# EAGLE board panel (EAGLE 7.5.0)
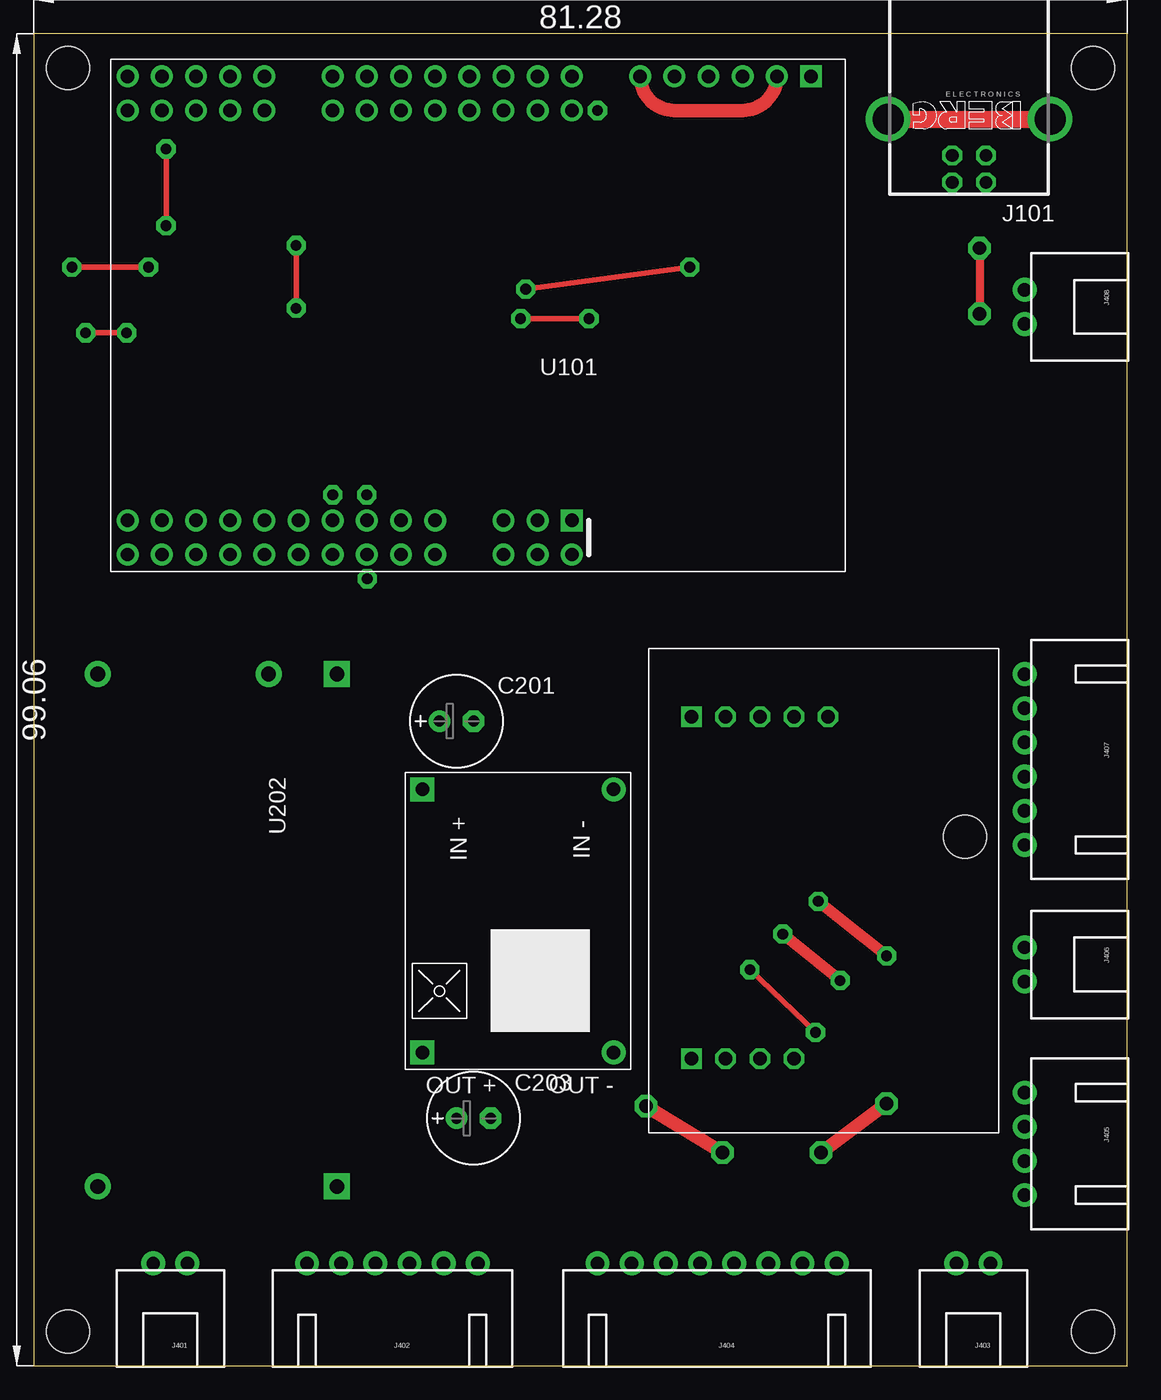
[diagram p0: board, top side]
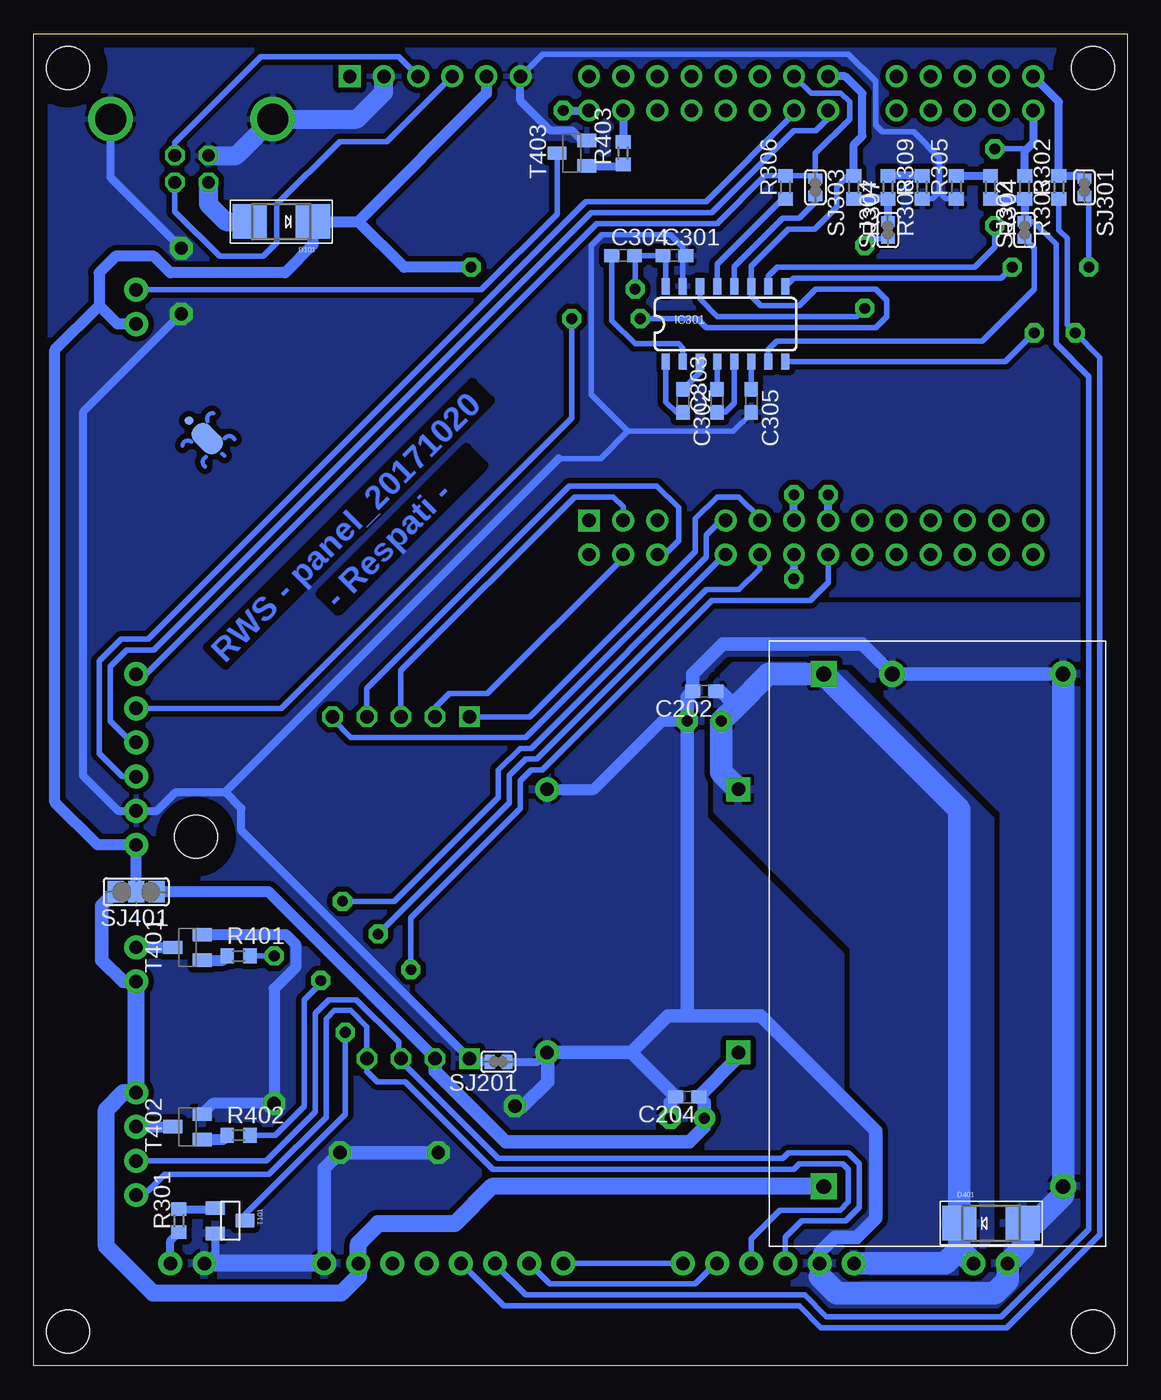
[diagram p1: board, bottom side, seen from below]

Size 81.28 x 99.06 mm. Coordinates in mm from the lower left corner, seen from the top.
Outline: 0,0 81.28,0 81.28,99.06 0,99.06 0,0
Copper layers (1*16): Top 0.035mm / dielectric 1.5mm / Bottom 0.035mm
Design rules "default *": minimum track width 10mil, minimum drill 24mil, track to track 8mil, track to pad 8mil, pad to pad 8mil, via to via 8mil, smd to smd 8mil, copper to edge 40mil, drill to drill 8mil, minimum pad ring 10mil, minimum via ring 8mil, stop-mask expansion 4mil, vias tented up to drill 0mil, thermal gap 10mil
Net classes: 0 default: width 0.406 mm, drill 0.59 mm, clearance 0.254 mm; 2 power: width 0.61 mm, drill 0.8 mm, clearance 0.305 mm
Holes 3.2 mm at 2.54,2.54 78.74,2.54 78.74,96.52 2.54,96.52
bRestrict: area 0,0 to 5.1,5.1; area 76.2,0 to 81.3,5.1; area 76.2,94 to 81.3,99.1; area 0,94 to 5.1,99.1

## Footprints (pad centres in the part's own frame; a part is rotated, then mirrored left to right if it is on the bottom)
E2,5-7 = drill 0.813 pad 1.6: + -1.27,0 | drill 0.813 pad 1.6 octagon: - 1.27,0
C0603 = smd 1.1 x 1: 1 -0.85,0; 2 0.85,0
SMADIODE = smd 2.54 x 2.54: A 2.349,0; C -2.349,0
SO016 = smd 0.6 x 1.2: 1 -4.445,-2.8; 2 -3.175,-2.8; 3 -1.905,-2.8; 4 -0.635,-2.8; 5 0.635,-2.8; 6 1.905,-2.8; 7 3.175,-2.8; 8 4.445,-2.8; 9 4.445,2.8; 10 3.175,2.8; 11 1.905,2.8; 12 0.635,2.8; 13 -0.635,2.8; 14 -1.905,2.8; 15 -3.175,2.8; 16 -4.445,2.8
PN61729-S = drill 0.95 octagon: 1 1.25,4.71; 2 -1.25,4.71; 3 -1.25,2.71; 4 1.25,2.71 | drill 2.3 pad 2.9: S1 -6.02,0; S2 6.02,0
XH-2-RA = drill 1 pad 1.778: 1 -1.27,0; 2 1.27,0
XH-6-RA = drill 1 pad 1.778: 1 -6.35,0; 2 -3.81,0; 3 -1.27,0; 4 1.27,0; 5 3.81,0; 6 6.35,0
XH-8-RA = drill 1 pad 1.778: 1 -8.89,0; 2 -6.35,0; 3 -3.81,0; 4 -1.27,0; 5 1.27,0; 6 3.81,0; 7 6.35,0; 8 8.89,0
XH-4-RA = drill 1 pad 1.778: 1 -3.81,0; 2 -1.27,0; 3 1.27,0; 4 3.81,0
R0603 = smd 1 x 1.1: 1 -0.85,0; 2 0.85,0
SJS = smd 0.762 x 1.016: 1 -0.635,0; 2 0.635,0
SJ_2 = smd 1.168 x 1.6: 1 -1.524,0; 2 0,0; 3 1.524,0
SOT23 = smd 1 x 1.4: 1 -0.95,-1.1; 2 0.95,-1.1; 3 0,1.1
SOT23-BEC = smd 1 x 1.4: B -0.95,-1.1; C 0,1.1; E 0.95,-1.1
MODULE_MEGA = drill 1 pad 1.626 square: P1 2.54,1.27; S1 20.32,34.29 | drill 1 pad 1.626: P2 5.08,1.27; P3 7.62,1.27; P4 10.16,1.27; P5 12.7,1.27; P6 15.24,1.27; S2 20.32,36.83; S3 22.86,34.29; S4 22.86,36.83; S5 25.4,34.29; S6 25.4,36.83; X1 30.48,34.29; X2 30.48,36.83; X3 33.02,34.29; X4 33.02,36.83; X5 35.56,36.83; X6 35.56,34.29; X7 38.1,34.29; X8 38.1,36.83; X9 40.64,34.29; X10 40.64,36.83; X11 43.18,34.29; X12 43.18,36.83; X13 45.72,34.29; X14 45.72,36.83; X15 48.26,34.29; X16 48.26,36.83; X17 50.8,34.29; X18 50.8,36.83; X19 53.34,34.29; X20 53.34,36.83; Y1 20.32,1.27; Y2 20.32,3.81; Y3 22.86,1.27; Y4 22.86,3.81; Y5 25.4,1.27; Y6 25.4,3.81; Y7 27.94,1.27; Y8 27.94,3.81; Y9 30.48,1.27; Y10 30.48,3.81; Y11 33.02,1.27; Y12 33.02,3.81; Y13 38.1,3.81; Y14 35.56,3.81; Y15 38.1,1.27; Y16 35.56,1.27; Z1 43.18,1.27; Z2 43.18,3.81; Z3 45.72,1.27; Z4 45.72,3.81; Z5 48.26,1.27; Z6 48.26,3.81; Z7 50.8,1.27; Z8 50.8,3.81; Z9 53.34,1.27; Z10 53.34,3.81
MP1584_MIN = drill 1 pad 1.778 square: 1 1.27,1.27; 3 20.83,1.27 | drill 1 pad 1.778: 2 1.27,15.49; 4 20.83,15.49
MOD_LM2596 = drill 1.1 pad 1.93 square: 1 -42.545,20.955; 2 -4.445,20.955 | drill 1.1 pad 1.93: 3 -42.545,3.175; 4 -4.445,3.175; 5 -42.545,15.875
MCP2515_CAN = drill 1 pad 1.524 square: 1 30.48,3.175; 5 5.08,3.175 | drill 1 pad 1.524 octagon: 2 30.48,5.715; 3 30.48,8.255; 4 30.48,10.795; 6 5.08,5.715; 7 5.08,8.255; 8 5.08,10.795; 9 5.08,13.335 | hole 3.2: 14,23.5
KURRO-LOGO = smd 2.54 x 1.651 rotated 45 bottom: P$1 0,0 | smd 0.635 x 0.635 rotated 45 bottom: P$2 1.347,1.347

## Placement (x,y rotation side)
C201  47uF/50V  [E2,5-7]  31.43,47.94 0 top
C202  100n  [C0603]  31.43,50.16 180 bottom
C203  100uF/25V  [E2,5-7]  32.7,18.41 0 top
C204  100n  [C0603]  32.7,20 180 bottom
C301  100n  [C0603]  33.66,82.55 0 bottom
C302  100n  [C0603]  33.02,71.75 270 bottom
C303  100n  [C0603]  30.48,71.75 90 bottom
C304  100n  [C0603]  37.47,82.55 0 bottom
C305  100n  [C0603]  27.94,71.75 270 bottom
D101  1N5822  [SMADIODE]  62.87,85.09 180 bottom
D401  1N5822  [SMADIODE]  10.12,10.62 0 bottom
IC301  MAX232SOIC16  [SO016]  29.84,77.47 0 bottom
J101  PN61729-S  [PN61729-S]  69.53,92.71 180 top
J401  POWER_IN  [XH-2-RA]  10.16,7.62 180 top
J402  OPTRONIK  [XH-6-RA]  26.67,7.62 180 top
J403  BUTTON  [XH-2-RA]  69.85,7.62 180 top
J404  VIA/JETSON  [XH-8-RA]  50.8,7.62 180 top
J405  JOYSTICK  [XH-4-RA]  73.66,16.51 270 top
J406  MONITOR  [XH-2-RA]  73.66,29.84 270 top
J407  RESV  [XH-6-RA]  73.66,45.09 270 top
J408  INDICATOR  [XH-2-RA]  73.66,78.74 270 top
R301  100  [R0603]  70.48,10.79 90 bottom
R302  100R  [R0603]  5.08,87.63 90 bottom
R303  1k  [R0603]  7.62,87.63 270 bottom
R304  1k  [R0603]  10.16,87.63 270 bottom
R305  1k  [R0603]  12.7,87.63 90 bottom
R306  100R  [R0603]  25.4,87.63 90 bottom
R307  10k  [R0603]  20.32,87.63 270 bottom
R308  10k  [R0603]  17.78,87.63 270 bottom
R309  10k  [R0603]  15.24,87.63 90 bottom
R401  1k  [R0603]  66.04,30.48 0 bottom
R402  1k  [R0603]  66.04,17.14 0 bottom
R403  1k  [R0603]  37.47,90.17 90 bottom
SJ201  [SJS]  46.74,22.61 180 bottom
SJ301  [SJS]  3.17,87.63 270 bottom
SJ302  [SJS]  7.62,84.45 90 bottom
SJ303  [SJS]  23.18,87.63 270 bottom
SJ304  [SJS]  17.78,84.45 90 bottom
SJ401  [SJ_2]  73.66,35.24 180 bottom
T101  MMBT2222A  [SOT23]  66.67,10.79 270 bottom
T401  [SOT23-BEC]  69.85,31.11 90 bottom
T402  [SOT23-BEC]  69.85,17.78 90 bottom
T403  [SOT23-BEC]  41.27,90.17 90 bottom
U101  [MODULE_MEGA]  60.33,97.16 180 top
U201  PSU_5V  [MP1584_MIN]  27.62,44.13 270 top
U202  PSU_12V  [MOD_LM2596]  1.59,8.89 270 top
U301  CAN_INTERFACE  [MCP2515_CAN]  45.72,53.34 270 top
U$1  KURRO_FOOTPRINT  [KURRO-LOGO]  68.38,68.94 0 top

## Library data of the parts
C201-C204 R301-R309 = rcl
C301-C305 R401-R403 = resistor
D101 D401 = adafruit
IC301 = SparkFun-DigitalIC; PROD_ID: IC-08171
J101 = con-berg
J401-J408 = SparkFun-Connectors
SJ201 SJ301-SJ304 SJ401 = jumper
T101 = SparkFun-DiscreteSemi
T401-T403 = transistor
U101 = encPhone
U201 = SparkFun-Boards
U202 U301 = scorpion
U$1 = SparkFun

## Nets
+12V [power]: J404.2 J405.1 J406.2 SJ401.3 U202.2
+24V [power]: C201.+ C202.1 D401.C J401.1 J402.6 U201.1 U202.1
BUS_CANH: J402.4 J405.3 U301.3
BUS_CANL: J402.3 J405.4 U301.4
BUS_CS: U101.X1 U301.9
BUS_INT: U101.X3 U301.5
BUTTON_RXD: U101.X5
BUTTON_TX: J403.1 R301.1
BUTTON_TXD: T101.3 U101.X8
GND: C301.2 C305.2 IC301.15 J101.4 J101.S1 J101.S2 J407.5 R305.1 R309.1 SJ201.2 T403.E U101.P2 U101.P6 U301.1
INDICATOR: R403.2 U101.Y4
JS_PWR_ENABLE: R402.2 U101.X4
MISO: U101.S6 U301.8
MONITOR_PWR_ENABLE: R401.2 U101.X2
MOSI: U101.S3 U301.7
N$1: R403.1 T403.B
N$2: IC301.9 SJ301.2
N$3: IC301.7 SJ302.1
N$4: R401.1 T401.B
N$5: J405.2 T402.C
N$6: R402.1 T402.B
N$7: J408.1 T403.C
N$8: IC301.12 SJ303.2
N$9: J406.1 T401.C
N$10: IC301.14 SJ304.1
N$11: R308.1 R309.2
N$12: D101.A J101.1
N$84: C302.1 IC301.3
N$85: C303.1 IC301.5
N$86: C302.2 IC301.1
N$87: C303.2 IC301.4
N$88: C304.1 IC301.2
N$89: C305.1 IC301.6
N$95: R304.1 R305.2
N$96: R301.2 T101.1
RESV1: U101.X6
RESV2: U101.X7
RESV3: U101.Y2
RESV_RX: R307.2 R308.2 SJ304.2
RESV_RXD: IC301.11 J407.2 R307.1 U101.Y15
RESV_TX: IC301.13 R306.1
RESV_TXD: J407.1 R306.2 SJ303.1 U101.Y16
SCK: U101.S4 U301.6
SCL: J407.4 U101.Y14
SDA: J407.3 U101.Y13
USB_D+: J101.3 U101.P3
USB_D-: J101.2 U101.P4
V- [power]: C201.- C202.2 C203.- C204.2 D401.A J401.2 J402.5 J403.2 J404.1 SJ201.1 T101.2 T401.E T402.E U201.2 U201.4 U202.3 U202.4 U202.5
VCC: C203.+ C204.1 C301.1 C304.2 D101.C IC301.16 J407.6 J408.2 SJ401.1 SJ401.2 U101.P5 U201.3 U301.2
VIA_RX: J404.6 R303.2 R304.2 SJ302.2
VIA_RXD: IC301.10 R303.1 U101.Z10
VIA_TX: IC301.8 J404.5 R302.1
VIA_TXD: R302.2 SJ301.1 U101.Z9
VIDEO+: J402.2 J404.7
VIDEO-: J402.1 J404.8

## Tracks (layer width: path | path; a pad name or v marks a point on that pad's centre or on a via)
+12V
  Bottom 1.016: J406.2 74.61,28.57 76.2,30.16 76.2,34.23 SJ401.3
  Bottom 1.27: J406.2 J405.1 74.61,20.32 75.88,19.05 75.88,8.89 72.39,5.4 58.42,5.4 57.15,6.67 J404.2 57.15,9.09 55.68,10.57 49.99,10.57 47.22,13.34 U202.2
+24V
  Bottom 1.016: C202.1 30.25,50.16 29.1,49.01
  Bottom 1.676: U201.1 30.16,44.13 C201.+ 29.1,49.01 26.67,51.44 U202.1 12.47,41.36 D401.C 12.47,8.66 | 12.47,8.66 J401.1 | J402.6 13.51,7.62 12.47,8.66
  pour Bottom (isolate 0.406): 10.79,6.99 20.32,6.99 20.32,29.21 20.32,31.11 30.48,41.27 30.48,50.8 29.21,52.07 21.59,52.07 10.16,40.64 10.16,9.53 10.79,8.89
BUS_CANH
  Bottom 0.406: J402.4 25.4,9.55 24.18,10.77 20.93,10.77 19.91,11.79 19.91,15.04 20.73,15.85 25.2,15.85 25.6,15.44 46.74,15.44 53.98,22.68 U301.3 54.15,22.86 54.15,24.08 57.3,27.23 59.33,27.23 60.35,26.21 60.35,18.9 64.01,15.24 J405.3
BUS_CANL
  Bottom 0.406: J402.3 27.94,9.45 25.81,11.58 21.34,11.58 20.73,12.19 20.73,14.63 21.13,15.04 24.38,15.04 24.79,14.63 47.14,14.63 53.65,21.13 55.74,21.13 56.52,21.91 U301.4 56.52,25.22 57.71,26.42 58.93,26.42 59.54,25.81 59.54,18.49 63.8,14.22 71.53,14.22 72.75,13.01 73.15,13.01 73.46,12.7 J405.4
BUS_CS
  Bottom 0.406: U101.X1 30.2,62.87 31.29,61.77 31.29,60.15 44.7,46.74 57.71,46.74 59.05,48.08 U301.9
BUS_INT
  Bottom 0.406: U101.X3 27.3,63.07 28.85,64.62 30.48,64.62 32.11,62.99 32.11,60.55 44.4,48.26 U301.5
BUTTON_RXD  (via drill 0.8 pad 1.42)
  Bottom 0.61: U101.X5 24.77,58.55 v24.79,58.52
BUTTON_TX
  Bottom 0.61: J403.1 71.12,9.31 R301.1
BUTTON_TXD  (via drill 0.8 pad 1.42)
  Top 0.406: v53.24,29.46 v58.12,24.79
  Bottom 0.406: v58.12,24.79 58.12,18.69 65.58,11.23 T101.3 | U101.X8 22.23,58.24 23.57,56.9 30.89,56.9 43.48,44.3 44.3,44.3 45.11,43.48 45.11,41.45 53.24,33.33 v53.24,29.46
GND  (via drill 1 pad 1.68)
  Top 0.61: v70.31,83.11 v70.31,78.23
  Top 1.016: U101.P6 arc90 47.62,93.34 52.7,93.34 arc90 U101.P2
  Top 1.27: J101.S2 J101.S1
  Bottom 0.406: C305.2 27.94,70.81 29.26,69.49 37.11,69.49 | R305.1 13.44,86.78 13.97,87.31 | 13.97,87.31 13.97,89.85 15.88,91.76 18.2,91.76 18.69,92.25 18.69,95.5 20.73,97.54 43.43,97.54 U101.P6 | R309.1 14.5,86.78 13.97,87.31 | 42.27,67.46 39.14,67.46 37.11,69.49 | IC301.15 33.02,82.33 C301.2 33.02,82.77 33.02,83.19 33.96,84.12 39.01,84.12 39.83,83.31 39.83,72.21 37.11,69.49
  Bottom 0.61: SJ201.2 48.64,22.61 U301.1 65.84,39.8 65.84,41.45 67.06,42.67 | 67.06,42.67 70.71,42.67 72.11,41.27 J407.5 75.01,41.27 77.62,43.89 77.62,70.92 v70.31,78.23 | 67.06,42.67 42.27,67.46 | v70.31,83.11 75.55,88.35 J101.S1 | T403.E 40.52,91.12 41.25,91.85 42.88,91.85 45.11,94.08 45.11,95.86 U101.P6
  Bottom 1.422: J101.4 66.22,90 J101.S2 57.25,92.71 55.27,94.69 55.27,95.86 U101.P2
  pour Bottom (isolate 0.406, rank 6): 0,0 81.28,0 81.28,99.06 0,99.06
INDICATOR
  Bottom 0.61: U101.Y4 R403.2
JS_PWR_ENABLE  (via drill 0.8 pad 1.42)
  Top 0.813: v59.94,28.65 v55.68,32.11
  Bottom 0.406: R402.2 63.32,17.14 61.16,19.3 61.16,27.23 59.94,28.45 v59.94,28.65 | U101.X4 27.3,59.26 28.85,57.71 31.29,57.71 43.89,45.11 44.7,45.11 45.92,43.89 45.92,41.86 v55.68,32.11
MISO
  Bottom 0.406: U301.8 56.52,50.37 41.45,65.43 34.95,65.43 33.33,63.8 33.33,61.37 34.37,60.33 U101.S6
MONITOR_PWR_ENABLE  (via drill 0.8 pad 1.42)
  Top 0.813: v63.4,30.48 v58.32,34.54
  Bottom 0.406: R401.2 v63.4,30.48 | U101.X2 29.9,60.33 44.3,45.92 45.11,45.92 46.74,44.3 46.74,42.27 54.46,34.54 v58.32,34.54
MOSI
  Bottom 0.406: U101.S3 37.47,63.88 38.2,64.62 41.05,64.62 53.98,51.69 U301.7
N$1
  Bottom 0.61: T403.B 37.56,89.22 R403.1
N$2  (via drill 0.8 pad 1.42)
  Top 0.406: v8.53,81.69 v2.85,81.69
  Bottom 0.406: IC301.9 24.79,80.87 9.35,80.87 v8.53,81.69 | v2.85,81.69 2.85,86.67 SJ301.2
N$3
  Bottom 0.406: IC301.7 26.67,75.56 26.04,76.2 10.77,76.2 6.91,80.06 6.91,83.11 SJ302.1
N$4
  Bottom 0.813: T401.B 67.2,30.16 R401.1
N$5
  Bottom 0.813: J405.2 T402.C
N$6
  Bottom 0.813: T402.B 67.2,16.83 R402.1
N$7
  Bottom 0.406: J408.1 48.01,80.01 42.38,85.64 T403.C
N$8
  Bottom 0.406: IC301.12 29.21,81.74 25.6,85.34 24.38,85.34 23.16,86.56 23.16,86.98 SJ303.2
N$9
  Bottom 0.813: J406.1 T401.C
N$10  (via drill 0.8 pad 1.42)
  Top 0.406: v19.51,83.31 v19.51,78.64
  Bottom 0.406: IC301.14 31.75,79.3 30.48,78.03 20.12,78.03 v19.51,78.64 | SJ304.1 19,83.82 v19.51,83.31
N$11
  Bottom 0.61: R309.2 R308.1
N$12
  Bottom 1.422: J101.1 68.28,86.38 66.99,85.09 D101.A
N$84
  Bottom 0.406: IC301.3 31.75,73.88 C302.1
N$85
  Bottom 0.406: IC301.5 29.21,71.58 29.88,70.91 C303.1
N$86
  Bottom 0.406: IC301.1 34.29,71.68 33.52,70.91 C302.2
N$87
  Bottom 0.406: IC301.4 C303.2
N$88
  Bottom 0.406: IC301.2 33.02,75.69 33.33,76 36.58,76 38.31,77.74 C304.1
N$89
  Bottom 0.406: IC301.6 C305.1
N$95
  Bottom 0.61: R305.2 R304.1
N$96
  Bottom 0.61: R301.2 67.88,11.64 T101.1
RESV1  (via drill 0.8 pad 1.42)
  Bottom 0.61: U101.X6 v24.77,64.77
RESV2  (via drill 0.8 pad 1.42)
  Bottom 0.61: U101.X7 v22.23,64.77
RESV3  (via drill 0.8 pad 1.42)
  Bottom 0.61: v41.91,93.34 U101.Y2
RESV_RX
  Bottom 0.61: SJ304.2 R308.2 R307.2
RESV_RXD  (via drill 0.8 pad 1.42)
  Top 0.406: v41.27,77.88 v36.2,77.88
  Bottom 0.406: R307.1 20.74,88.48 21.59,87.63 21.59,86.16 23.22,84.53 25.2,84.53 27.94,81.79 IC301.11 27.94,79.55 27.23,78.84 24.38,78.84 23.16,80.06 18.69,80.06 17.88,79.25 17.88,78.03 18.69,77.22 31.29,77.22 31.95,77.88 v36.2,77.88 | J407.2 62.87,48.9 41.27,70.48 v41.27,77.88
  Bottom 0.61: R307.1 20.32,90.81 19.68,91.44 19.68,94.61 20.95,95.89 U101.Y15
RESV_TX
  Bottom 0.406: IC301.13 30.48,81.92 25.61,86.78 R306.1
RESV_TXD
  Bottom 0.406: U101.Y16 23.5,94.61 21.27,94.61 20.64,93.98 20.64,92.71 23.18,90.17 SJ303.1 23.39,88.48 R306.2 26.94,88.48 30.48,84.94 39.42,84.94 72.92,51.44 J407.1
SCK
  Bottom 0.406: U101.S4 37.47,60.07 47.55,49.99 50.39,49.99 51.44,48.95 U301.6
SCL
  Bottom 0.406: U101.Y14 24.77,93.09 31.29,86.56 40.23,86.56 72.75,54.05 74.78,54.05 76.4,52.43 76.4,45.52 74.7,43.81 J407.4
SDA
  Bottom 0.406: U101.Y13 22.23,92.79 23.16,91.85 24.79,91.85 30.89,85.75 39.83,85.75 72.34,53.24 74.37,53.24 75.59,52.02 75.59,47.95 73.99,46.35 J407.3
USB_D+
  Bottom 0.406: J101.3 70.78,90.97 64.41,97.33 54.15,97.33 U101.P3
USB_D-
  Bottom 0.406: J101.2 70.78,85.82 67.46,82.5 64.21,82.5 63.2,83.52 63.2,86.36 58.52,91.03 55.02,91.03 U101.P4
V-  (via drill 1 pad 1.68)
  Top 1.016: v45.52,19.3 v51.21,15.85 | v63.4,19.51 v58.52,15.85
  Bottom 0.61: T101.2 67.78,8.43 J403.2 | SJ201.1 43.81,22.61 U201.4
  Bottom 0.813: U201.2 39.64,42.86 34.54,47.95 32.72,47.95 C201.- | T401.E 62.55,32.06 61.77,31.29 61.77,29.67 63.4,28.04 v63.4,19.51 67.97,19.51 T402.E
  Bottom 1.016: U202.3 U202.5 19.68,53.66 30.06,53.66 32.28,51.44 C202.2 32.7,49.74 C201.- 32.7,26.23 32.92,26.01 | C203.- 33.97,19.58 C204.2 36.85,23.3 | 36.85,23.3 U201.4 43.08,23.27 43.08,21.13 44.91,19.3 v45.52,19.3 | J402.5 22.86,8.43 21.74,9.55 20.12,9.55 18.69,10.97 18.69,17.48 27.23,26.01 32.92,26.01 | 32.92,26.01 34.15,26.01 36.85,23.3 | J404.1 59.69,14.68 v58.52,15.85 v51.21,15.85
  Bottom 1.27: J404.1 J403.2
  Bottom 1.676: 22.86,6.67 21.59,5.4 9.84,5.4 8.89,6.35 J401.2 7.72,8.79 7.72,10.57 | U202.3 U202.4 4.76,12.71 6.91,10.57 7.72,10.57 | 7.72,10.57 D401.A
  pour Bottom (isolate 0.406, rank 2): 0,0 81.28,0 81.28,41.27 73.66,41.27 73.66,31.11 57.07,30.89 51.99,35.97 45.09,43.18 31.75,56.52 0,56.52
VCC  (via drill 0.8 pad 1.42)
  Top 0.406: v48.77,81.69 v36.58,80.06
  Bottom 0.406: IC301.16 34.29,82.33 C301.1 C304.2 36.58,82.51 v36.58,80.06
  Bottom 0.813: U101.P5 47.62,94.61 57.15,85.09 | 57.15,85.09 D101.C 60.52,83.35 62.59,81.28 71.12,81.28 72.34,82.5 75.18,82.5 76.4,81.28 76.4,78.84 | 76.4,78.84 75.03,77.47 J408.2 | 76.4,78.84 79.69,75.55 79.69,41.91 76.52,38.73 J407.6 SJ401.2 SJ401.1 63.82,35.24 U301.2 | v48.77,81.69 53.75,81.69 57.15,85.09
  Bottom 1.016: U201.3 28.89,22.96 C204.1 31.43,19.58 C203.+ 31.43,17.78 32.54,16.67 46.2,16.67 51.44,21.91 U301.2
VIA_RX
  Bottom 0.406: J404.6 46.99,7.57 44.7,5.28 23.98,5.28 22.35,3.66 9.35,3.66 2.85,10.16 2.85,73.56 5.28,76 5.28,83.39 6.99,85.09 SJ302.2
  Bottom 0.61: R304.2 R303.2 SJ302.2
VIA_RXD  (via drill 0.8 pad 1.42)
  Top 0.406: v9.84,84.77 v9.84,90.49
  Bottom 0.406: v9.84,84.77 9.84,83.19 11.34,81.69 26.01,81.69 26.67,81.03 IC301.10 | v9.84,90.49 7.79,90.49 7.62,90.32
  Bottom 0.61: U101.Z10 6.99,90.96 7.62,90.32 R303.1
VIA_TX  (via drill 0.8 pad 1.42)
  Top 0.406: v6.91,76.81 v3.86,76.81
  Bottom 0.406: J404.5 49.48,7.62 46.33,4.47 24.38,4.47 22.76,2.85 8.94,2.85 2.03,9.75 2.03,74.98 v3.86,76.81 4.47,77.42 4.47,83.84 5.08,84.45 R302.1 | IC301.8 9.05,74.67 v6.91,76.81
VIA_TXD
  Bottom 0.61: SJ301.1 3.39,88.48 R302.2 5.08,93.98 U101.Z9
VIDEO+
  Bottom 0.406: J402.2 30.58,7.62 32.11,6.1 42.93,6.1 J404.7
VIDEO-
  Bottom 0.406: J402.1 J404.8

## Text on the board
Bottom: - Respati - | RWS - panel_20171020